# Altium PCB Board.PcbDoc (part 2 of 2)
Units mil, origin at the board's own origin, x right, y up, seen from the top; angles counter-clockwise.
Board outline 3359.57 x 1791.01 mil, 4 copper layers (Top Layer, GND, Power, Bottom Layer), stack 61.811 mil thick; 87 components, 83 nets, 345 pads, 431 vias.
Unrouted connection lines stored in the file: 1.
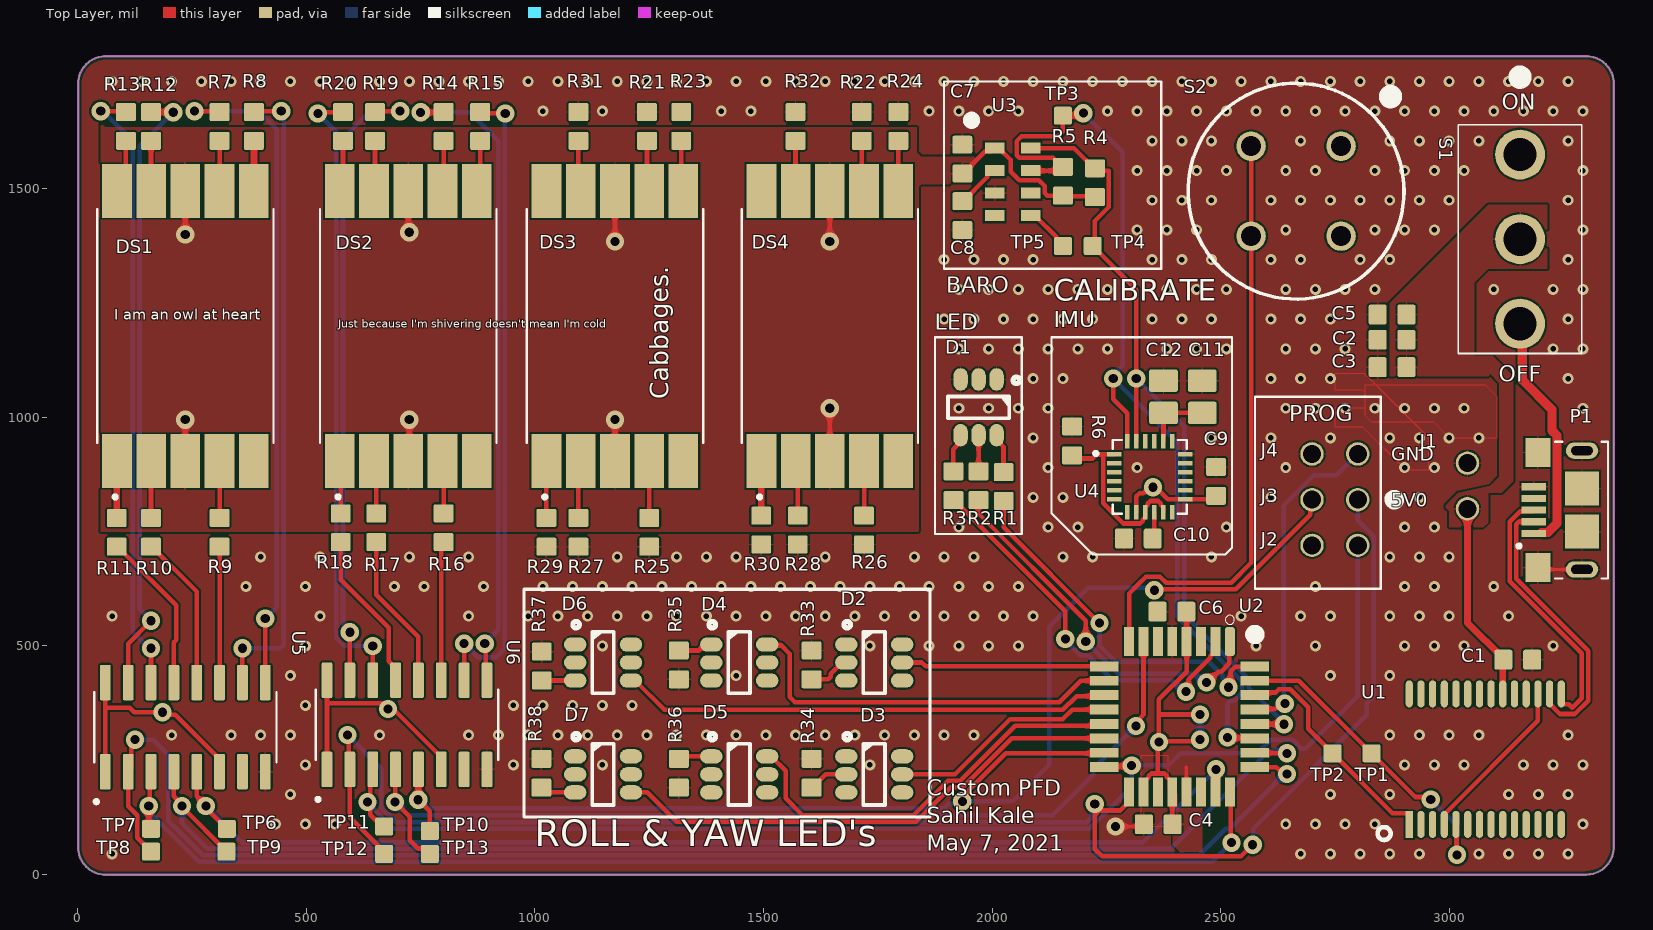
[diagram p0: Top Layer view]

## Via types
v1: diameter 24, hole 12, Top Layer to Bottom Layer, tented both sides, 368 vias
v2: diameter 40, hole 20, Top Layer to Bottom Layer, tented both sides, 63 vias

## Nets (pads, with @x,y where several pads share a name; then routed paths per layer and width w, separated by ;. In a path a pad name is that pad's centre, name@x,y a point inside that pad or via, vN(x,y) a via of type N, cw(c..) or ccw(c..) an arc to the next point about the centre after c; other vN are vias at no path point) (continued)
NetR1_2: (continued)
  Top Layer w10: R1.2 2025.44,759.56 v2(2235,550) ; v2(2517.09,409.66) 2521.94,414.51 2521.94,444.66 2531.6,454.31 2573.64,454.31 U2.32
  Bottom Layer w10: v2(2235,550) 2235,500 2270,465 2474.4,465 2505,434.4 2505,429.86 2517.09,417.78 v2(2517.09,409.66)
NetR2_2: R2.2 U2.1 | length 824.1
  Top Layer w10: R2.2 1969.14,817.68 1969.14,790.86 2205,555 v2(2205,509.89) ; v2(2469.1,420.2) 2471.31,420.2 2494.95,443.84 2501.33,443.84 2519.23,461.75 2519.23,508.56 U2.1
  Bottom Layer w10: v2(2205,509.89) 2275.82,439.07 2442.11,439.07 2460.98,420.2 v2(2469.1,420.2)
NetR3_2: R3.2 U2.2 | length 856.2
  Top Layer w10: R3.2 1917.41,818.98 2160.33,576.06 v2(2160.33,515.33) ; v2(2424.33,399.97) 2430.07,405.71 2430.07,427.34 2477.07,474.34 2477.07,477.23 2488.74,488.9 U2.2
  Bottom Layer w10: v2(2160.33,515.33) 2160.33,512.13 2192.57,479.89 2209.09,479.89 2263.98,425 2392.79,425 2417.82,399.97 v2(2424.33,399.97)
NetR6_1: R6.1 U4.1 U4.9 U4.11 | length 406.2
  Top Layer w10: R6.1@2177.99,910 2220.24,910 2229.45,919.21 2240,919.21 ; U4.1 2240,919.21 ; U4.11 2374.53,802.87 2368.96,808.44 2368.96,811.72 2363.69,816.99 2346,816.99 2340.72,811.72 2340.72,808.44 2335.16,802.87 U4.9 2335.04,792.32 2335.04,781.89 2329.59,776.44 2329.59,773.16 2324.32,767.89 2286.94,767.89 2242.89,811.94 2242.89,916.32 2240,919.21
NetR7_1: R7.1 U5.9 | length 1472.9
  Top Layer w10: v2(255,1670) 307.99,1670 R7.1 ; U5.9 v2(410,560)
  Bottom Layer w10: v2(255,1670) 395,1670 435,1630 435,585 v2(410,560)
NetR8_1: R8.1 U5.10 | length 1399.6
  Top Layer w10: U5.10 v2(360,495) ; R8.1 387.01,1670 v2(445,1670)
  Bottom Layer w10: v2(360,495) 444.14,495 450,500.86 450,1665 v2(445,1670)
NetR9_1: R9.1 U5.11 | length 297.1
  Top Layer w10: U5.11 R9.1
NetR10_1: R10.1 U5.12 | length 339.7
  Top Layer w10: R10.1 161.97,717.01 260,618.98 U5.12
NetR11_1: R11.1 U5.13 | length 354.2
  Top Layer w10: R11.1 86.97,717.01 101.65,702.32 215,588.98 215,513.04 210,508.04 U5.13
NetR12_1: R12.1 U5.15 | length 1358
  Top Layer w10: U5.15 110,505 v2(160,555) ; R12.1 208.09,1667.99 v2(208.6,1667.49)
  Bottom Layer w10: v2(160,555) 135,580 135,1593.89 v2(208.6,1667.49)
NetR13_1: R13.1 U5.14 | length 1357.4
  Top Layer w10: v2(50,1670) 102.99,1670 R13.1 ; U5.14 v2(160,495)
  Bottom Layer w10: v2(50,1670) 55,1670 120,1605 120,530 155,495 v2(160,495)
NetR14_1: R14.1 U6.9 | length 1440.9
  Top Layer w10: v2(749.92,1667.37) 799.38,1667.37 R14.1 ; v2(890,505) 892.5,502.5 892.5,427.38 U6.9
  Bottom Layer w10: v2(749.92,1667.37) 857.63,1667.37 920,1605 920,535 v2(890,505)
NetR15_1: R15.1 U6.10 | length 1417.4
  Top Layer w10: U6.10 v2(845,505) ; R15.1 882.99,1665 v2(935,1665)
  Bottom Layer w10: v2(845,505) 875,475 915.61,475 934.23,493.62 934.23,1664.23 v2(935,1665)
NetR16_1: R16.1 U6.11 | length 304.2
  Top Layer w10: U6.11 795,722.01 R16.1
NetR17_1: R17.1 U6.12 | length 340.3
  Top Layer w10: R17.1 652.8,612.2 745,520 U6.12
NetR18_1: R18.1 U6.13 | length 351.8
  Top Layer w10: R18.1 575,645 680,540 680,466.85 695,451.85 U6.13
NetR19_1: R19.1 U6.15 | length 1397
  Top Layer w10: U6.15 v2(595,530) ; R19.1 652.01,1670 v2(705,1670)
  Bottom Layer w10: v2(595,530) 595,535.86 580,550.86 580,1610 640,1670 v2(705,1670)
NetR20_1: R20.1 U6.14 | length 1382.6
  Top Layer w10: v2(525,1665) 527.99,1667.99 R20.1 ; U6.14 v2(645,500)
  Bottom Layer w10: v2(525,1665) 565,1625 565,517.57 582.57,500 v2(645,500)
NetTP1_1: TP1.1 U1.5 U2.31 | length 704.9
  Top Layer w10: U2.31 2671.26,423.74 TP1.1 2925.43,169.57 2953.89,169.57 v2(2959.63,163.83) ; U1.5 3016.04,108.53 3016.04,43.96 v2(3017.07,42.93)
  Bottom Layer w10: v2(2959.63,163.83) 3017.07,106.38 v2(3017.07,42.93)
NetTP2_1: TP2.1 U1.1 U2.30 | length 506.2
  Top Layer w10: U2.30 2580.39,398.07 2620.64,398.07 2627.57,405 2652.43,405 2691.37,366.06 2691.37,318.63 TP2.1 2875.91,134.09 2909.76,134.09 2912.64,131.22 U1.1
NetTP5_1: TP5.1 U3.5 | length 100.9
  Top Layer w10: U3.5 2094,1441.18 2140.31,1394.87 2140.31,1389.69 TP5.1
NetTP6_1: TP6.1 U2.23 U5.5 | length 2511.7
  Top Layer w10: U5.5 260,171.22 280,151.22 v2(280,150) 280,145.73 TP6.1 ; U2.23 2489.37,181.06 2489.37,229.37 v2(2490,230)
  Bottom Layer w10: v2(280,150) 360,70 2330,70 v2(2490,230)
NetTP7_1: TP7.1 U2.24 U5.3 | length 2685.1
  Top Layer w10: TP7.1 155,105 v2(155,150) 157.5,152.5 157.5,222.5 U5.3 ; U2.24 2521.96,178.71 2521.96,71.42 v2(2523.68,69.7)
  Bottom Layer w10: v2(155,150) 155,141.88 165,131.88 165,127.57 264.57,28 2481.98,28 v2(2523.68,69.7)
NetTP8_1: TP8.1 U2.25 U5.2 | length 3136
  Top Layer w10: v2(125,295) 125,286.88 116.81,278.69 116.81,231.81 U5.2 110,149.02 129.5,129.52 129.5,80.5 TP8.1 ; U2.25 2579.45,229.88 2584.33,234.76 2622.12,234.76 2636.88,220 v2(2645,220)
  Bottom Layer w10: v2(125,295) 165,295 197.78,262.22 197.78,117.22 273,42 2453.56,42 2511.25,99.7 2519.7,99.7 2640,220 v2(2645,220)
NetTP9_1: TP9.1 U2.26 U5.4 | length 2862.9
  Top Layer w10: U5.4 210,171.22 227.78,153.44 v2(227.78,150) 227.78,147.95 TP9.1@325.73,50 ; U2.26 2575.2,265.63 2644.37,265.63 v2(2645,265)
  Bottom Layer w10: v2(227.78,150) 227.78,112.22 284,56 2391,56 2605,270 2640,270 v2(2645,265)
NetTP13_1: TP13.1 U2.7 U6.4 | length 2138.3
  Top Layer w10: U6.4 694.39,229.39 694.39,159.39 v2(693.79,158.79) 726.24,126.33 726.24,74.6 743.78,57.06 757.94,57.06 TP13.1 ; v2(2315,325) 2315,333.12 2331.26,349.38 U2.7
  Bottom Layer w10: v2(693.79,158.79) 722.57,130 2133.13,130 2221.19,218.06 2221.19,231.19 v2(2315,325)
NetU1_4: U1.4 U1.17 | length 370.2
  Top Layer w10: U1.4 2989.41,131.22 3194.13,335.95 U1.17
RST: J4.2 U2.29 | length 714.7
  Top Layer w10: U2.29 2576.22,362.4 2621.06,362.4 2632.42,373.75 v2(2640.53,373.75)
  Bottom Layer w10: v2(2640.53,373.75) 2637.64,376.65 2637.64,806.56 2704.31,873.22 2753.22,873.22 J4.2
SCK: J3.2 TP12.1 U2.17 U6.2 | length 3522.6
  Top Layer w10: v2(590,305) 592.5,302.5 592.5,232.5 U6.2 595,125 TP12.1@670,50 ; v2(2224.56,153.99) 2224.56,150.44 v2@2235,140 ; U2.17 2299.76,159.76 2280,140 v2@2235,140 ; v2(2570,65) 2544.7,39.7 2240.86,39.7 2225,55.56 2225,130 v2@2235,140
  Bottom Layer w10: v2(590,305) 663.79,231.21 663.79,146.36 696.15,114 2206.77,114 2218.82,126.04 2218.82,148.25 v2(2224.56,153.99) ; v2(2570,65) 2570.94,65.94 2570.94,100 2820,349.06 2820,375 2834.59,389.59 2834.59,739.97 2800,774.56 J3.2
USB_N: P1.2 U1.16 | length 619.5
  Top Layer w10: P1.2 3185.09,771.83 3152.36,771.83 3146.5,765.98 3146.5,647.11 3303.9,489.71 3303.9,380.01 3274.94,351.05 3242.02,351.05 3219.72,373.35 U1.16
USB_P: P1.3 U1.15 | length 591.9
  Top Layer w10: P1.3 3182.4,794.37 3155.1,794.37 3132.5,771.78 3132.5,641.31 3289.9,483.91 3289.9,385.8 3269.14,365.05 3261.94,372.25 3247.97,372.25 3245.32,374.9 U1.15
VCC_IN: P1.1 S1.3 | length 512.5
  Top Layer w20: S1.3 3160,1199.96 3160,1081.9 3225,1016.9 3225,971.22 3235.69,960.52 3235.69,767.82 3216.06,748.19 P1.1@3201.85,748.19
pads on no net: D2.1 D2.3 D2.4 D2.6 D3.1 D3.3 D3.4 D3.6 D4.2 D4.3 D4.4 D4.5 D5.2 D5.3 D5.4 D5.5 D6.1 D6.2 D6.5 D6.6 D7.1 D7.2 D7.5 D7.6 DS1.5 DS2.5 DS3.5 DS3.10 DS4.5 DS4.10 P1.4 R23.1 S1.1 U1.2 U1.3 U1.6 U1.8 U1.9 U1.10 U1.11 U1.12 U1.13 U1.14 U1.19 U1.22 U1.23 U1.24 U1.27 U1.28 U2.3 U2.6 U2.19 U2.22 U3.4 U3.6 U4.2 U4.3 U4.4 U4.5 U4.6 U4.7 U4.12 U4.14 U4.15 U4.16 U4.17 U4.19 U4.21 U4.22 U5.7 U6.7

## Polygon pours and split planes (outlines as drawn)
GND on Top Layer "GND_TOP" (solid, remove dead copper, pour order 13): 60.84,-0.8 cw(c60.84,59.41) 0.63,59.41 0.63,1730 cw(c60.84,1730) 60.84,1790.21 3300,1790.21 cw(c3300,1730) 3360.21,1730 3360.21,60 cw(c3300,60) 3300,-0.21 cw(c3298.56,1.23) 3298.56,-0.8
5V0 on Top Layer "5V0_L01_P010" (solid, remove dead copper, pour order 10): 2405,230 2395,220 2395,65 2415,45 2420,50 2460,50 2460,145 2435,170 2420,170 2420,215
5V0 on Top Layer "5V0_L01_P004" (solid, remove dead copper, pour order 4): 1965,1510 1965,1565 1960,1570 1845,1570 1835,1580 1835,1635 60,1635 50,1645 50,750 1845,750 1840,755 1840,1505 1845,1510 1895,1510
5V0 on Top Layer "5V0_L01_P002" (solid, remove dead copper, pour order 2): 2325,260 2325,105 2405,105 2405,175 2400,175 2385,190 2385,260
5V0 on Top Layer "5V0_L01_P011" (solid, remove dead copper, pour order 11): 3020,835 2990,805 3000,795 3000,760 3075,760 3085,770 3085,835 3115,835 3140,860 3140,1090 3095,1135 3055,1135 3055,1295 3085,1325 3215,1325 3215,1465 3085,1465 2870,1250 2870,1090 3085,1090 3090,1095 3110,1075 3110,870 3090,850
5V0 on Top Layer "5V0_L01_P012" (solid, remove dead copper, pour order 12): 2860,1070 2815,1070 2815,1005 2830,990 2965,990 3000,955 3105,955 3105,1045 3080,1070
5V0 on Top Layer "5V0" (solid, remove dead copper, pour order 9): 2750,1095 2750,1060 2810,1060 2815,1055 2815,1020 2745,1020 2750,1015 2750,980 2810,980 2905,885 2955,885 2955,955 2815,1095
GND on Bottom Layer "GND_BOTTOM" (solid, remove dead copper, pour order 8): 60.84,-0.8 cw(c60.84,59.41) 0.63,59.41 0.63,1730 cw(c60.84,1730) 60.84,1790.21 3300,1790.21 cw(c3300,1730) 3360.21,1730 3360.21,60 cw(c3300,60) 3300,-0.21 cw(c3298.56,1.23) 3298.56,-0.8
5V0 on Power (split plane): 3305.25,1769.85 3310.4,1768.82 3315.38,1767.13 3320.1,1764.81 3324.47,1761.89 3328.42,1758.42 3331.89,1754.47 3334.81,1750.1 3337.13,1745.38 3338.82,1740.4 3339.85,1735.25 3340.16,1730.51 3340.11,1730 3340.11,60 3340.16,59.49 3339.85,54.75 3338.82,49.6 3337.13,44.62 3334.81,39.9 3331.89,35.53 3328.42,31.58 3324.47,28.11 3320.1,25.19 3315.38,22.87 3310.4,21.18 3305.25,20.15 3300.51,19.84 3300,19.89 3298.56,19.75 3298.56,20.79 3294.96,19.29 60.84,19.29 60.34,19.24 55.6,19.56 50.44,20.58 45.46,22.27 40.74,24.6 36.37,27.52 32.42,30.98 28.95,34.94 26.03,39.31 23.71,44.02 22.02,49 20.99,54.16 20.68,58.9 20.73,59.41 20.73,1730 20.68,1730.51 20.99,1735.25 22.02,1740.4 23.71,1745.38 26.03,1750.1 28.95,1754.47 32.42,1758.42 36.37,1761.89 40.74,1764.81 45.46,1767.13 50.44,1768.82 55.6,1769.85 60.34,1770.16 60.84,1770.11 3300,1770.11 3300.51,1770.16
GND on GND (split plane): 3305.25,1769.85 3310.4,1768.82 3315.38,1767.13 3320.1,1764.81 3324.47,1761.89 3328.42,1758.42 3331.89,1754.47 3334.81,1750.1 3337.13,1745.38 3338.82,1740.4 3339.85,1735.25 3340.16,1730.51 3340.11,1730 3340.11,60 3340.16,59.49 3339.85,54.75 3338.82,49.6 3337.13,44.62 3334.81,39.9 3331.89,35.53 3328.42,31.58 3324.47,28.11 3320.1,25.19 3315.38,22.87 3310.4,21.18 3305.25,20.15 3300.51,19.84 3300,19.89 3298.56,19.75 3298.56,20.79 3294.96,19.29 60.84,19.29 60.34,19.24 55.6,19.56 50.44,20.58 45.46,22.27 40.74,24.6 36.37,27.52 32.42,30.98 28.95,34.94 26.03,39.31 23.71,44.02 22.02,49 20.99,54.16 20.68,58.9 20.73,59.41 20.73,1730 20.68,1730.51 20.99,1735.25 22.02,1740.4 23.71,1745.38 26.03,1750.1 28.95,1754.47 32.42,1758.42 36.37,1761.89 40.74,1764.81 45.46,1767.13 50.44,1768.82 55.6,1769.85 60.34,1770.16 60.84,1770.11 3300,1770.11 3300.51,1770.16

## Keep-outs
Keep-Out Layer:
  lines w5: 60.84,1790.21 ccw(c60.84,1730) 0.63,1730 0.63,59.41 ccw(c60.84,59.41) 60.84,-0.8 3298.56,-0.8 ccw(c3298.56,1.23) 3300,-0.21 ccw(c3300,60) 3360.21,60 3360.21,1730 ccw(c3300,1730) 3300,1790.21 60.84,1790.21 ; 60.84,1790.21 60.84,1790.21

## Silkscreen, mask and mechanical layers (free items; w line width, h text height)
Top Overlay:
  circle w32.5: c2880,820 r5
  lines w5: 1875,745 2065,745 2065,1175 1875,1175 1875,745 ; 1895,1325 1895,1735 2370,1735 2370,1325 1895,1325 ; 2130,790 2220,700 2510,700 2525,715 2525,1175 2130,1175 2130,1080 2130,790 ; 2575,625 2850,625 2850,1045 2575,1045 2575,625
  lines w7: 976,126 1864,126 1864,624 976,624 976,126
  text "ON" at 3115,1660.66 h60
  text "BARO" at 1900,1260.66 h60
  text "CALIBRATE" at 2134.96,1240 h80
  text "I am an owl at heart" at 80,1205.42 h40
  text "Just because I'm shivering doesn't mean I'm cold" at 570,1190 h30
  text "IMU" at 2135,1185 h60
  text "LED" at 1875,1180 h60
  text "OFF" at 3108.85,1065.66 h60
  text "Cabbages." at 1291.67,1040 h40 r90
  text "PROG" at 2650,980 h60
  text "GND /  / 5V0" at 2873.13,795 h50
  text "ROLL & YAW LED's" at 1000,41.64 h100
  text "Custom PFD / Sahil Kale / May 7, 2021" at 1857.55,40 h60
Bottom Overlay:
  text "NOTE: ALTITUDE IN FT" at 1430,1200 h60

## Text inside footprints (layer, text, board x,y; h text height)
P1: Mechanical 13 "PCB END" at 3341.77,984.25 h16 r90